# EAGLE board 5v-buck-regulator (EAGLE 6.2)
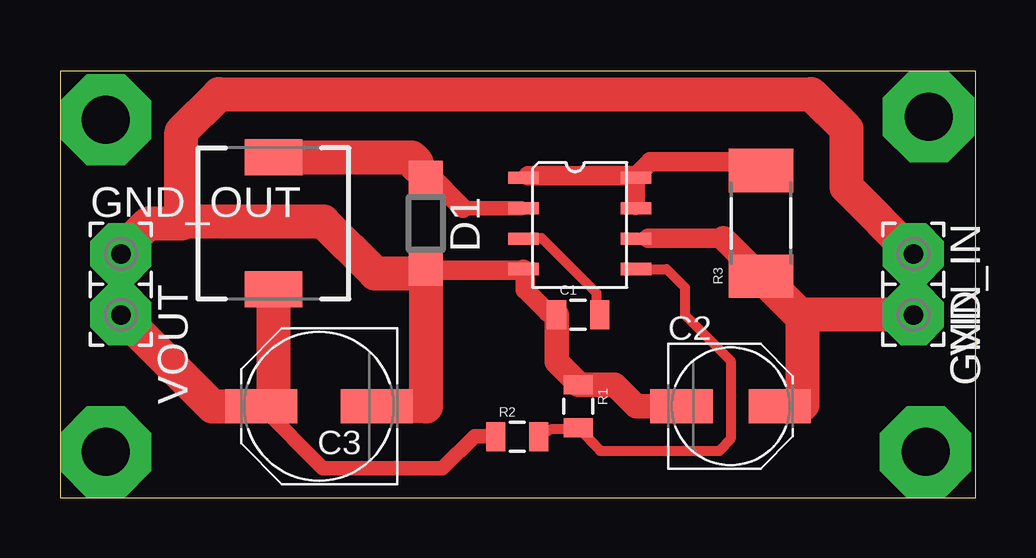
[diagram p0: board, top side]

Size 38.15 x 17.77 mm. Coordinates in mm from the lower left corner, seen from the top.
Outline: 0,0 38.15,0 38.15,17.77 0,17.77 0,0
Copper layers (1*16): Top 0.035mm / dielectric 1.5mm / Bottom 0.035mm
Design rules: minimum track width 16mil, minimum drill 24mil, track to track 16mil, track to pad 16mil, pad to pad 16mil, via to via 16mil, smd to smd 8mil, copper to edge 0mil, drill to drill 8mil, minimum pad ring 10mil, minimum via ring 8mil, stop-mask expansion 4mil, vias tented up to drill 0mil, thermal gap 10mil

## Footprints (pad centres in the part's own frame; a part is rotated, then mirrored left to right if it is on the bottom)
0805 = smd 0.8 x 1.2: 1 -0.9,0; 2 0.9,0
PANASONIC_C = smd 2.6 x 1.4: + 2.05,0; - -2.05,0
PANASONIC_D = smd 3 x 1.4: + 2.4,0; - -2.4,0
SOD123 = smd 1.4 x 1.4: A 1.9,0; C -1.9,0
2,54/0,8 = drill 0.813 pad 2.54 octagon: 1 0,0
B82462G = smd 2.4 x 1.5: P$1 0,2.75; P$2 0,-2.75
R2010 = smd 1.8 x 2.7: 1 -2.2,0; 2 2.2,0
SOIC-8 = smd 0.508 x 1.27: 1 -1.905,-2.286; 2 -0.635,-2.286; 3 0.635,-2.286; 4 1.905,-2.286; 5 1.905,2.413; 6 0.635,2.413; 7 -0.635,2.413; 8 -1.905,2.413

## Placement (x,y rotation side)
C1  470pF  [0805]  21.59,7.62 0 top
C2  100uF  [PANASONIC_C]  27.94,3.81 0 top
C3  470uF  [PANASONIC_D]  10.79,3.81 180 top
D1  1N5819  [SOD123]  15.24,11.43 270 top
GND_IN  [2,54/0,8]  35.56,10.16 270 top
GND_OUT  [2,54/0,8]  2.54,10.16 0 top
L1  [B82462G]  8.89,11.43 0 top
R1  1k8  [0805]  21.59,3.81 270 top
R2  5k6  [0805]  19.05,2.54 0 top
R3  20mOhm  [R2010]  29.21,11.43 90 top
U1  MC33063AP  [SOIC-8]  21.59,11.43 270 top
VIN  [2,54/0,8]  35.56,7.62 270 top
VOUT  [2,54/0,8]  2.54,7.62 270 top

## Library data of the parts
C1 L1 R1-R3 = SparkFun
C2 C3 = rcl
D1 = diode
GND_IN GND_OUT VIN VOUT = wirepad
U1 = Synapseware

## Nets
GND: C1.1 C2.- C3.- D1.A GND_IN.1 GND_OUT.1 R1.1 U1.4
N$2: C1.2 U1.3
N$3: R3.2 U1.1 U1.7 U1.8
N$32: D1.C L1.P$1 U1.2
N$55: R1.2 R2.2 U1.5
VIN: C2.+ R3.1 U1.6 VIN.1
VOUT: C3.+ L1.P$2 R2.1 VOUT.1

## Tracks (layer width: path | path; a pad name or v marks a point on that pad's centre or on a via)
GND
  Top 0.406: 19.23,9.47 U1.4 | D1.A 15.44,9.47 15.24,9.27 | 20.73,7.32 C1.1 20.32,7.72 | 35.56,10.13 35.23,11.02 GND_IN.1 | 21.49,4.88 R1.1 21.77,4.88
  Top 0.813: 15.44,9.47 19.23,9.47 | 20.32,7.72 19.38,8.66 19.38,9.47 U1.4
  Top 1.016: 21.49,4.88 20.7,5.66 C1.1 | C2.- 24,3.81 23.11,4.7 21.83,4.7 R1.1
  Top 1.422: 15.24,9.27 15.24,3.81 C3.- | 35.56,10.13 32.77,12.95 32.77,15.37 31.29,16.82 6.63,16.82 5.05,15.24 5.05,11.43 | 5.05,11.43 5.31,11.51 10.97,11.51 13.13,9.35 15.06,9.35 D1.A | GND_OUT.1 2.54,10.29 3.68,11.43 5.05,11.43
N$1  (via drill 2 pad 3.81)
  other vias: 1.91,15.75
N$2
  Top 0.406: C1.2 22.35,7.72 22.35,8.53 20.07,10.82 19.25,10.82 U1.3
N$3
  Top 0.406: 19.51,13.41 U1.1 | 23.98,12.19 U1.7 | 23.98,13.41 U1.8 24,13.41 | 28.4,13.99 R3.2
  Top 0.813: 19.51,13.41 23.98,13.41 23.98,12.19 | 28.4,13.99 24.59,13.99 24,13.41
N$4  (via drill 2 pad 3.81)
  other vias: 1.91,1.91
N$5  (via drill 2 pad 3.81)
  other vias: 36.07,1.91
N$6  (via drill 2 pad 3.81)
  other vias: 36.2,15.88
N$32
  Top 0.406: 19.23,12.06 U1.2 | 15.32,13.54 D1.C 15.44,13.82 14.86,13.97
  Top 0.61: 16.79,12.06 19.23,12.06
  Top 0.813: 15.32,13.54 16.79,12.06
  Top 1.422: 14.86,13.82 14.86,13.97 14.65,14.18 L1.P$1
N$55
  Top 0.406: 24.26,9.47 U1.5 25.27,9.53 26.04,8.76 26.04,7.62 27.94,5.71 27.94,2.44 27.51,1.98 27.48,1.96 22.5,1.96 | 22.5,1.96 21.64,2.85 | 21.64,2.85 20.45,2.85 R2.2 | 22.5,1.96 R1.2 | 21.64,2.87 R1.2 | 21.64,2.85 R1.2
VIN
  Top 0.406: 24.51,10.82 U1.6
  Top 0.813: 27.64,10.82 24.51,10.82
  Top 1.016: 27.64,10.82 R3.1
  Top 1.422: VIN.1 30.94,7.62 | 30.94,7.62 30.94,3.89 30.48,3.81 C2.+ | 30.94,7.62 30.82,7.62 R3.1
VOUT
  Top 0.406: 17.78,2.56 R2.1
  Top 0.61: 17.78,2.56 17.27,2.56 15.93,1.22 10.96,1.22 C3.+
  Top 1.422: VOUT.1 6.35,3.81 C3.+ 8.89,3.8 L1.P$2